# Altium PCB CTR-IMU-Board-Rev-B.PcbDoc
Units mil, origin at the board's own origin, x right, y up, seen from the top; angles counter-clockwise.
Board outline 904.88 x 778.79 mil, 2 copper layers (Top Layer, Bottom Layer), stack 61.2 mil thick; 19 components, 13 nets, 69 pads, 18 vias.
Unrouted connection lines stored in the file: 2.
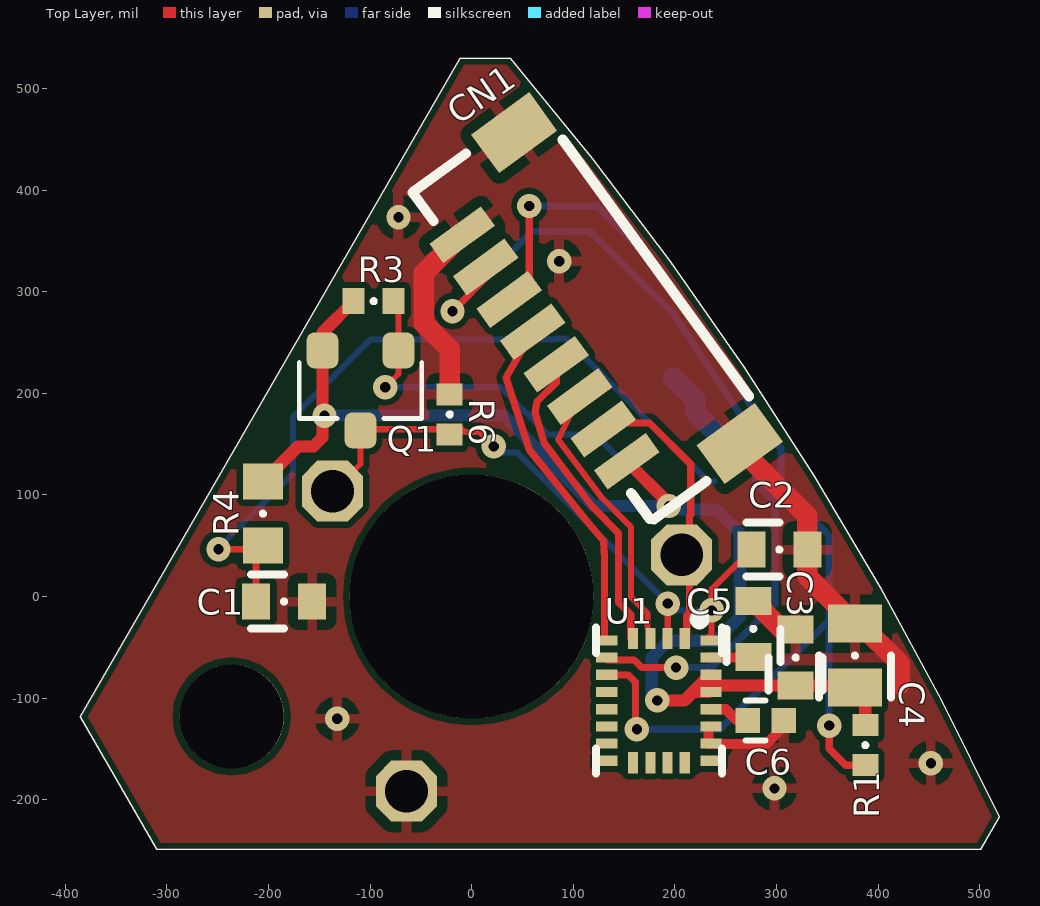
[diagram p0: Top Layer view]
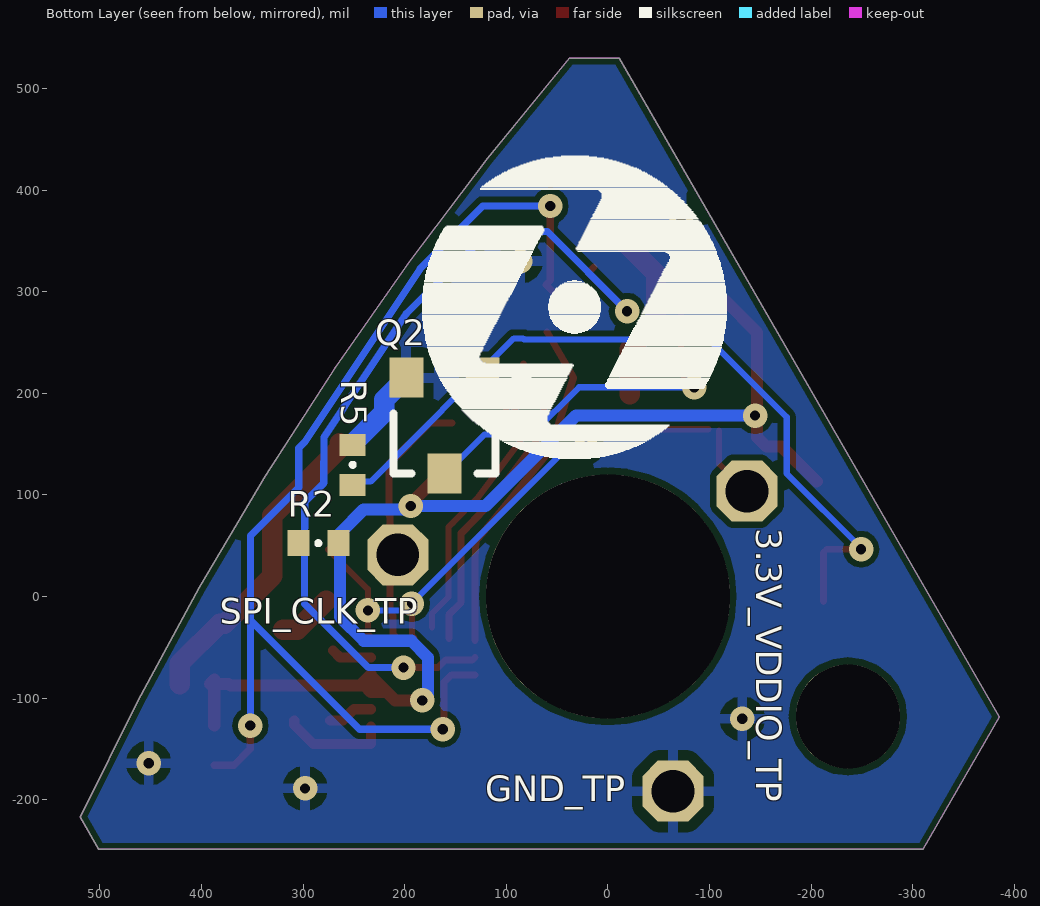
[diagram p1: Bottom Layer view, seen from below]
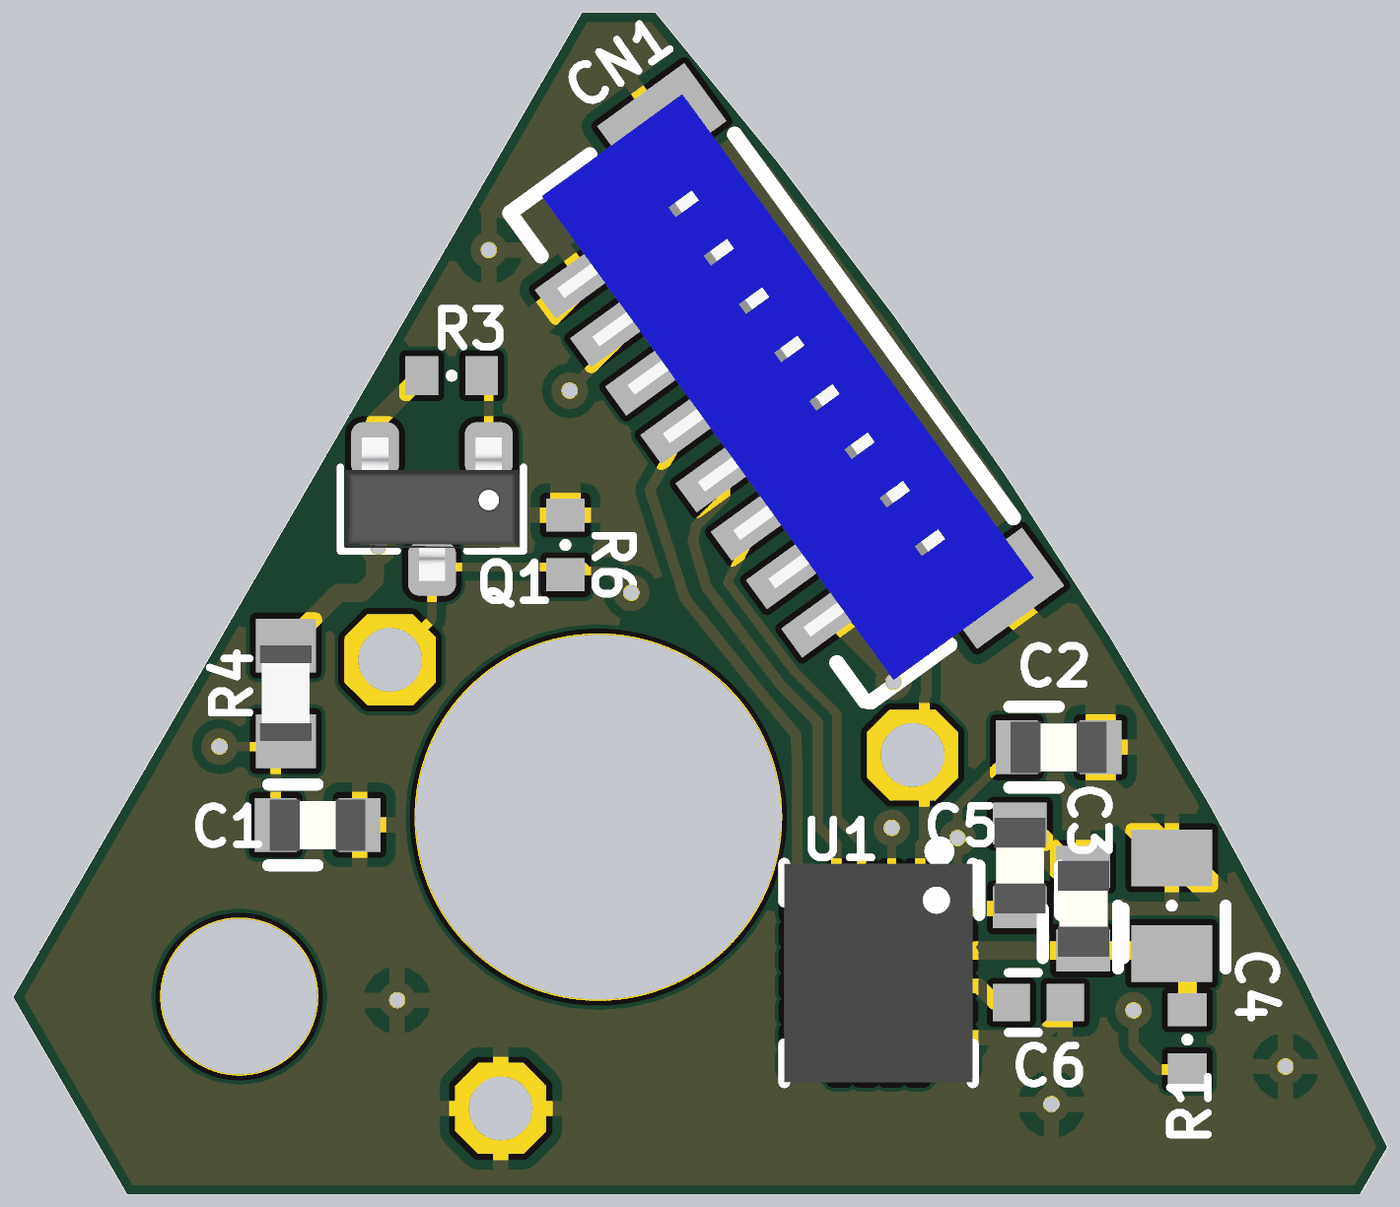
[diagram p2: 3D render of the assembled board from above, using the file's embedded part models]

## Layer stack, top to bottom
Top Solder: solder mask 0.4, Solder Resist, Dk 3.5
Top Layer: signal copper 1.8
Dielectric1: core 57.6, Dk 4.2
Bottom Layer: signal copper 1.8
Bottom Solder: solder mask 0.4, Solder Resist, Dk 3.5

## Board outline
-310.09,-248.96 501.07,-248.96 519.46,-217.11 462.88,-103.06 402.07,8.8 337.13,118.31 268.14,225.32 195.2,329.67 118.41,431.22 37.88,529.83 -11.12,529.83 -385.42,-118.48

## Design rules (kind name [scope] priority, off if disabled: settings)
Clearance [All] p1: gap=6 ignorepadtopadclearanceinfootprint=FALSE except(0: Arc-Hole Track-Hole SMDPad-Hole THPad-Hole Via-Hole Fill-Hole Poly-Hole Region-Hole Text-Hole)
ComponentClearance ComponentClearance_BAT [InComponent('BT1') vs InComponent('CN3')] p1: gap=0 collisioncheckmode=3 verticalgap=0 showdistances=FALSE
ComponentClearance [All] p2: gap=7 collisioncheckmode=3 verticalgap=7 showdistances=FALSE
HoleSize [All] p1: absolutevalues=TRUE maxlimit=300 minlimit=10 maxpercent=80.000 minpercent=20.000
HoleToHoleClearance [All] p1: gap=7 allowstackedmicrovias=TRUE
MinimumSolderMaskSliver [InNet('VIN')] p1: minsoldermaskwidth=0.5
NetAntennae NetAntennae_ANT [InNetClass('ANT')] p1: netantennaetolerance=0
NetAntennae [All] p2: netantennaetolerance=0
PolygonConnect [All] p1: connectstyle=Relief reliefconductorwidth=10 reliefentries=4 polygonreliefangle="90 Angle" airgapwidth=10
RoutingVias [All] p1: holewidth=20 width=34 viastyle="Through Hole" minholewidth=10 minwidth=22 maxholewidth=35 maxwidth=50
SMDNeckDown [All] p1: percent=120.000
SilkToBoardRegionClearance [InNet('3.3V')] p1:
SilkToSilkClearance [All] p1: silktosilkclearance=0
SilkToSolderMaskClearance [IsPad] p1: minsilkscreentomaskgap=0 clearancetoexposedcopper=TRUE
SolderMaskExpansion [All] p1: expansion=4
Width Width_BT [InNetClass('BT')] p1: maxlimit=40 minlimit=10 preferedwidth=15
Width Width_VDD [InNet('3.3V')] p2: maxlimit=20 minlimit=7 preferedwidth=10
Width [All] p3: maxlimit=30 minlimit=6 preferedwidth=7
22 further rules are at their usual default settings.

## Components (designator, comment, footprint, x,y, rotation, side; value= is the part's Value field where it differs from the comment)
3.3V_VDDIO_TP "Test Point" "TestPoint-TH 42 mil" -137.01,103.54 r90 bottom
C1 "0.1uF" CAPC0603(1608)_L -184.65,-5.12 r0 top
C2 "0.1uF" CAPC0603(1608)_L 302.76,46.06 r0 top
C3 "0.1uF" CAPC0603(1608)_L 318.9,-60.24 r90 top
C4 "10uF" CAPC0805(2012)_L 377.17,-58.27 r90 top
C5 "0.1uF" CAPC0603(1608)_L 277.17,-31.89 r90 top
C6 "0.01uF" CAPC0402(1005)_N 289.37,-122.05 r0 top
CN1 "JST 1mm 0.7A" JST-BM08B-SRSS-TB 112.2,274.02 r126 top locked
GND_TP "Test Point" "TestPoint-TH 42 mil" -64.17,-191.73 r90 bottom
Q1 "DMG2305UX" DMG2305UX-7 -109.45,202.76 r180 top locked
Q2 "2N7002P" SOT23 161.02,168.11 r0 bottom
R1 "10K" RESC0402(1005)_N 387.4,-146.46 r270 top
R2 "10K" RESC0402(1005)_N 285.04,52.36 r180 bottom
R3 "47K" RESC0402(1005)_N -96.46,290.55 r0 top
R4 "2.2K" RESC0603(1608)_N -205.51,81.5 r90 top
R5 "200K 0402" RESC0402(1005)_N 251.18,129.53 r270 bottom
R6 "47K" RESC0402(1005)_N -21.65,179.13 r90 top locked
SPI_CLK_TP "Test Point" "TestPoint-TH 42 mil" 206.69,40.94 r90 bottom
U1 "LSM9DS1TR" LSM9DS1TR 184.3,-102.56 r270 top

## Footprints (in the part's own frame and the unit in brackets; to place one, negate y for a bottom-side part, rotate by r counter-clockwise, add the part's x,y. Pads: shape width x height; smd on the part's side, far side on the other; paste and mask are expansions set on the pad)
CAPC0402(1005)_N [mm] "Chip Capacitor, Body 1.0x0.5mm, Height 0.7mm, IPC Medium Density"
  rect 0.62x0.62 smd: 1(-0.45,0) 2(0.45,0)
  silkscreen extent -0.5,-0.5 0,0.5, body extent -0.55,-0.3 0.55,0.3, height 0.7
CAPC0603(1608)_L [mm] "Chip Capacitor, Body 1.6x0.8mm, Height 1.0mm, IPC High Density"
  rect 0.7x0.9 smd: 1(-0.7,0) 2(0.7,0)
  silkscreen extent -0.82,-0.68 0.05,0.68, body extent -0.8,-0.44 0.8,0.43, height 0.86
CAPC0805(2012)_L [mm] "Chip Capacitor, Body 2.0x1.2mm, Height 1.55mm, IPC High Density"
  rect 0.95x1.35 smd: 1(-0.8,0) 2(0.8,0)
  silkscreen extent -1.05,-0.9 0.05,0.9, body extent -1.1,-0.72 1.1,0.72, height 1.55
DMG2305UX-7 [mm] "SOT95P240X110-3L30 - Small Outline Transistor (SOT23), 0.95 mm pitch; 3 pin, 2.90 mm L X 1.30 mm W X 1.10 mm H body"
  rrect50% 0.8x0.9 smd: D(0,1) G(-0.95,-1) S(0.95,-1)
  silkscreen extent -1.53,-0.7 1.53,0.7, body extent -1.45,-1.2 1.45,1.2, height 1.1
JST-BM08B-SRSS-TB [mm] "JST 1mm x 8 SMT Vertical Connector"
  rect 1.2x1.8 smd: 0(-4.8,-1.275) 0(4.8,-1.275)
  rect 0.6x1.6 smd: 1(-3.5,1.275) 2(-2.5,1.275) 3(-1.5,1.275) 4(-0.5,1.275) 5(0.5,1.275) 6(1.5,1.275) 7(2.5,1.275) 8(3.5,1.275)
  silkscreen extent -5.07,-2.15 5.09,1.66, body extent -5,-1.84 5,1.76, height 4.32
LSM9DS1TR [mil] "PQFN, 24-Leads, Body 3.50x3.00mm, Pitch 0.43mm, Thermal Pad 0.00x0.00mm, IPC High Density"
  rect 10x21 smd: 1(-59.25,51.23) 6(-59.25,-51.23) 7(-42.32,-51.23) 8(-25.39,-51.23) 9(-8.46,-51.23) 10(8.46,-51.23) 11(25.39,-51.23) 12(42.32,-51.23) 13(59.25,-51.23) 18(59.25,51.23) 19(42.32,51.23) 20(25.39,51.23) 21(8.46,51.23) 22(-8.46,51.23) 23(-25.39,51.23) 24(-42.32,51.23)
  rect 21x10 smd: 2(-61.07,25.39) 3(-61.07,8.46) 4(-61.07,-8.46) 5(-61.07,-25.39) 14(61.07,-25.39) 15(61.07,-8.46) 16(61.07,8.46) 17(61.07,25.39)
  silkscreen extent -85,-62 72,62, body extent -72,-62 72,62, height 39
RESC0402(1005)_N [mm] "Chip Resistor, Body 1.0x0.5mm, IPC Medium Density"
  rect 0.55x0.65 smd: 1(-0.5,0) 2(0.5,0)
  silkscreen extent -0.05,-0.05 0.05,0.05, body extent -0.52,-0.27 0.53,0.28, height 0.4
RESC0603(1608)_N [mm] "Chip Resistor, Body 1.6x0.8mm, IPC Medium Density"
  rect 0.9x1 smd: 1(-0.8,0) 2(0.8,0)
  silkscreen extent -0.05,-0.05 0.05,0.05, body extent -0.8,-0.43 0.8,0.43, height 0.51
SOT23 [mm] "SOT-23; 3 Leads; Body 3.0 x 2.5 mm, inc. leads (LxW max)"
  rect 0.85x1 smd: 1(-0.95,-1.2) 2(0.95,-1.2) 3(0,1.2)
  silkscreen extent -2.05,-1.32 1.28,1.2, body extent -1.5,-1.27 1.5,1.23, height 1.1
"TestPoint-TH 42 mil" [mil] "Test Point - Thru-Hole 42 mil"
  oct 60x60 hole 42: 1(0,0)

## Part data
3.3V_VDDIO_TP GND_TP SPI_CLK_TP: library part "TestPoint, small"
C1 C2 C3 C5: library part "CAP CER 0.1UF 16V 10% X7R 0603", "0.1uF 0603 16V", Capacitance=0.1µF, Manufacturer=Kemet, Manufacturer Part Number=C0603C104K4RACTU, Operating Temperature="-55°C ~ 125°C", Package / Case="0603 (1608 Metric)", Ratings=-, Supplier Part Number 1=399-1096-2-ND, Temperature Coefficient=X7R, Tolerance=±10%, Voltage - Rated=16V, Applications="General Purpose", Category=Capacitors, ComponentLink1Description=http://www.kemet.com/datasheets&C0603C104K4RACTU, ComponentLink1URL=http://www.kemet.com/datasheets&C0603C104K4RACTU, Features=-, Height - Seated (Max)=-, Lead Spacing=-, Lead Style=-, Mounting Type="Surface Mount, MLCC", Packaging="Tape & Reel (TR)", Pricing 1="4000=0.00414, 8000=0.00378, 12000=0.0036, 28000=0.00342, 100000=0.00248 (USD)", RoHS="RoHS Compliant", Size / Dimension="0.063\" L x 0.031\" W (1.60mm x 0.80mm)", Stock 1=2360000, Supplier 1=Digi-Key, Thickness (Max)="0.034\" (0.87mm)"
C4: library part "CAP CER 10UF 10V Y5V 0805", "10uF 0805 10V", Capacitance=10µF, Manufacturer="Taiyo Yuden", Manufacturer Part Number=LMK212F106ZG-T, Operating Temperature="-30°C ~ 85°C", Package / Case="0805 (2012 Metric)", Ratings=-, Supplier Part Number 1=587-1312-1-ND, Temperature Coefficient="Y5V (F)", Tolerance="-20%, +80%", Voltage - Rated=10V, Applications="General Purpose", Category=Capacitors, ComponentLink1Description=http://www.yuden.co.jp/or/product/category/capacitor/LMK212F106ZG-T.pdf, ComponentLink1URL=http://www.yuden.co.jp/or/product/category/capacitor/LMK212F106ZG-T.pdf, Features=-, Height - Seated (Max)=-, Lead Spacing=-, Lead Style=-, Mounting Type="Surface Mount, MLCC", Packaging="Cut Tape (CT)", Pricing 1="1=0.17, 10=0.115, 50=0.0662, 100=0.0546, 250=0.046, 500=0.03852, 1000=0.03163 (USD)", RoHS="RoHS Compliant", Size / Dimension="0.079\" L x 0.049\" W (2.00mm x 1.25mm)", Stock 1=194456, Supplier 1=Digi-Key, Thickness (Max)="0.053\" (1.35mm)"
C6: library part "CAP CER 0.01UF 25V 10% X5R 0402", "0.01uF 0402", Capacitance=10000pF, Manufacturer="Murata Electronics North America", Manufacturer Part Number=GRM155R71E103KA01D, Operating Temperature="-55°C ~ 125°C", Package / Case="0402 (1005 Metric)", Ratings=-, Supplier Part Number 1=490-1312-1-ND, Temperature Coefficient=X7R, Tolerance=±10%, Voltage - Rated=25V, Applications="General Purpose", Category=Capacitors, ComponentLink1Description=http://www.murata.com/~/media/webrenewal/support/library/catalog/products/capacitor/mlcc/c02e.ashx, ComponentLink1URL=http://www.murata.com/~/media/webrenewal/support/library/catalog/products/capacitor/mlcc/c02e.ashx, Features=-, Height - Seated (Max)=-, Lead Spacing=-, Lead Style=-, Mounting Type="Surface Mount, MLCC", Packaging="Cut Tape (CT)", Pricing 1="1=0.1, 10=0.012, 50=0.0066, 100=0.0057, 250=0.00464, 500=0.00396, 1000=0.00309, 5000=0.00258 (USD)", RoHS="RoHS Compliant", Size / Dimension="0.039\" L x 0.020\" W (1.00mm x 0.50mm)", Stock 1=4802323, Supplier 1=Digi-Key, Thickness (Max)="0.022\" (0.55mm)"
CN1: library part JST-BM08B-SRSS-TB(LF)(SN), "1mm Locking Header, 8-Pin", Manufacturer="Japan Solderless Terminals (JST)", Manufacturer Part Number=BM08B-SRSS-TB(LF)(SN), Supplier Part Number 1=455-1794-1-ND, ComponentLink1Description=https://datasheet.ciiva.com/730/esr-730608.pdf, ComponentLink1URL=https://datasheet.ciiva.com/730/esr-730608.pdf, ComponentLink2Description=https://datasheet.ciiva.com/26894/getdatasheetpartid-640965-26894529.pdf, ComponentLink2URL=https://datasheet.ciiva.com/26894/getdatasheetpartid-640965-26894529.pdf, ComponentLink3Description=https://datasheet.ciiva.com/712/esr-712616.pdf, ComponentLink3URL=https://datasheet.ciiva.com/712/esr-712616.pdf, ComponentLink4Description=https://datasheet.ciiva.com/712/esr-712617.pdf, ComponentLink4URL=https://datasheet.ciiva.com/712/esr-712617.pdf, ComponentLink5Description=https://datasheet.ciiva.com/8052/91630-8052091.pdf, ComponentLink5URL=https://datasheet.ciiva.com/8052/91630-8052091.pdf, ComponentLink6Description=https://datasheet.ciiva.com/16380/esr-16380526.pdf, ComponentLink6URL=https://datasheet.ciiva.com/16380/esr-16380526.pdf, No of Positions=8, Pitch="1 mm", Pricing 1="1=0.93, 10=0.814, 100=0.7024, 500=0.5747 (USD)", Stock 1=18919, Style/Orientation="Vertical Header/Plug", Supplier 1=Digikey, Termination=Solder, Type="Shrouded Header"
Q1: "MOSFET P-CH 20V 4.2A SOT23", Current - Continuous Drain (Id) @ 25°C="4.2A (Ta)", Drain to Source Voltage (Vdss)=20V, Input Capacitance (Ciss) @ Vds="808pF @ 15V", Manufacturer="Diodes Incorporated", Manufacturer Part Number=DMG2305UX-7, Operating Temperature="-55°C ~ 150°C (TJ)", Package / Case="TO-236-3, SC-59, SOT-23-3", Power - Max=1.4W, Supplier Device Package=SOT-23, Supplier Part Number 1=DMG2305UX-7DICT-ND, Category="Discrete Semiconductor Products", ComponentLink1Description=http://www.diodes.com/_files/datasheets/DMG2305UX.pdf, ComponentLink1URL=http://www.diodes.com/_files/datasheets/DMG2305UX.pdf, Creator=osman, FET Feature=Standard, FET Type="MOSFET P-Channel, Metal Oxide", Gate Charge (Qg) @ Vgs="10.2nC @ 4.5V", Mounting Type="Surface Mount", Packaging="Cut Tape (CT)", Pricing 1="1=0.38, 10=0.311, 100=0.1649, 500=0.10846, 1000=0.0739 (USD)", Rds On (Max) @ Id, Vgs="52 mOhm @ 4.2A, 4.5V", RoHS="RoHS Compliant", Stock 1=78669, Supplier 1=Digi-Key, Vgs(th) (Max) @ Id="900mV @ 250µA"
Q2: "MOSFET N-CH 60V 0.36A SOT-23", Current - Continuous Drain (Id) @ 25°C="360mA (Ta)", Drain to Source Voltage (Vdss)=60V, Drive Voltage (Max Rds On,  Min Rds On)=10V, Input Capacitance (Ciss) (Max) @ Vds="50pF @ 10V", Manufacturer="Nexperia USA Inc.", Manufacturer Part Number=2N7002P,235, Operating Temperature="-55°C ~ 150°C (TJ)", Package / Case="TO-236-3, SC-59, SOT-23-3", Power Dissipation (Max)="350mW (Ta)", Supplier Device Package="TO-236AB (SOT23)", Supplier Part Number 1=1727-1865-1-ND, Category="Discrete Semiconductor Products", ComponentLink1Description=http://assets.nexperia.com/documents/data-sheet/2N7002P.pdf, ComponentLink1URL=http://assets.nexperia.com/documents/data-sheet/2N7002P.pdf, FET Feature=-, FET Type=N-Channel, Gate Charge (Qg) (Max) @ Vgs="0.8nC @ 4.5V", Mounting Type="Surface Mount", Packaging="Cut Tape (CT)", Part Status=Active, Pricing 1="1=0.15, 10=0.135, 100=0.0735, 500=0.04522, 1000=0.03084 (USD)", Rds On (Max) @ Id, Vgs="1.6 Ohm @ 500mA, 10V", RoHS="RoHS Compliant", Stock 1=77037, Supplier 1=Digi-Key, Technology="MOSFET (Metal Oxide)", Vgs (Max)=±20V, Vgs(th) (Max) @ Id="2.4V @ 250µA"
R1 R2: library part "RES 10K OHM 1% 1/10W 0402", "10K 0402", Manufacturer="Panasonic Electronic Components", Manufacturer Part Number=ERJ-2RKF1002X, Operating Temperature="-55°C ~ 155°C", Package / Case="0402 (1005 Metric)", Power (Watts)="0.1W, 1/10W", Resistance (Ohms)=10k, Supplier Device Package=0402, Supplier Part Number 1=P10.0KLCT-ND, Temperature Coefficient=±100ppm/°C, Tolerance=±1%, Category=Resistors, ComponentLink1Description=http://industrial.panasonic.com/www-cgi/jvcr13pz.cgi?E+PZ+3+AOA0002+ERJ2RKF1002X+7+WW, ComponentLink1URL=http://industrial.panasonic.com/www-cgi/jvcr13pz.cgi?E+PZ+3+AOA0002+ERJ2RKF1002X+7+WW, Composition="Thick Film", Creator=osman, Features="Automotive AEC-Q200", Height="0.016\" (0.40mm)", Number of Terminations=2, Packaging="Cut Tape (CT)", Pricing 1="1=0.1, 50=0.0196, 100=0.0149, 250=0.01104, 500=0.00816, 1000=0.00544, 5000=0.00383 (USD)", RoHS="RoHS Compliant", Size / Dimension="0.039\" L x 0.020\" W (1.00mm x 0.50mm)", Stock 1=8784573, Supplier 1=Digi-Key
R3 R6: library part "RES 47K OHM 5% 1/10W 0402", "47K 0402", Manufacturer="Panasonic Electronic Components", Manufacturer Part Number=ERJ-2GEJ473X, Operating Temperature="-55°C ~ 155°C", Package / Case="0402 (1005 Metric)", Power (Watts)="0.1W, 1/10W", Resistance (Ohms)=47k, Supplier Device Package=0402, Supplier Part Number 1=P47KJCT-ND, Temperature Coefficient=±200ppm/°C, Tolerance=±5%, Category=Resistors, ComponentLink1Description=http://industrial.panasonic.com/www-cgi/jvcr13pz.cgi?E+PZ+3+AOA0001+ERJ2GEJ473X+7+WW, ComponentLink1URL=http://industrial.panasonic.com/www-cgi/jvcr13pz.cgi?E+PZ+3+AOA0001+ERJ2GEJ473X+7+WW, Composition="Thick Film", Features="Automotive AEC-Q200", Height="0.016\" (0.40mm)", Number of Terminations=2, Packaging="Cut Tape (CT)", Pricing 1="1=0.1, 50=0.0106, 100=0.0078, 250=0.00596, 500=0.00476, 1000=0.0035, 5000=0.00251 (USD)", RoHS="RoHS Compliant", Size / Dimension="0.039\" L x 0.020\" W (1.00mm x 0.50mm)", Stock 1=1670564, Supplier 1=Digi-Key
R4: library part "RES 2.2K OHM 1/10W 5% 0603 SMD", "2.2K 0603", Manufacturer="Panasonic Electronic Components", Manufacturer Part Number=ERJ-3GEYJ222V, Package / Case="0603 (1608 Metric)", Power (Watts)="0.1W, 1/10W", Resistance (Ohms)=2.2k, Supplier Device Package=0603, Supplier Part Number 1=P2.2KGCT-ND, Temperature Coefficient=±200ppm/°C, Tolerance=±5%, Category=Resistors, ComponentLink1Description=http://industrial.panasonic.com/www-cgi/jvcr13pz.cgi?E+PZ+3+AOA0001+ERJ3GEYJ222V+7+WW, ComponentLink1URL=http://industrial.panasonic.com/www-cgi/jvcr13pz.cgi?E+PZ+3+AOA0001+ERJ3GEYJ222V+7+WW, Composition="Thick Film", Features=-, Height="0.022\" (0.55mm)", Number of Terminations=2, Packaging="Cut Tape (CT)", Pricing 1="1=0.1, 50=0.0126, 100=0.0096, 250=0.00716, 500=0.00528, 1000=0.00352, 2500=0.00297 (USD)", RoHS="RoHS Compliant", Size / Dimension="0.063\" L x 0.031\" W (1.60mm x 0.80mm)", Stock 1=685364, Supplier 1=Digi-Key
R5: library part "RES 200K OHM 1% 1/10W 0402", Manufacturer="Panasonic Electronic Components", Manufacturer Part Number=ERJ-2RKF2003X, Operating Temperature="-55°C ~ 155°C", Package / Case="0402 (1005 Metric)", Power (Watts)="0.1W, 1/10W", Resistance (Ohms)=200k, Supplier Device Package=0402, Supplier Part Number 1=P200KLCT-ND, Temperature Coefficient=±100ppm/°C, Tolerance=±1%, Category=Resistors, ComponentLink1Description=http://industrial.panasonic.com/www-cgi/jvcr13pz.cgi?E+PZ+3+AOA0002+ERJ2RKF2003X+7+WW, ComponentLink1URL=http://industrial.panasonic.com/www-cgi/jvcr13pz.cgi?E+PZ+3+AOA0002+ERJ2RKF2003X+7+WW, Composition="Thick Film", Creator=osman, Features="Automotive AEC-Q200", Height="0.016\" (0.40mm)", Number of Terminations=2, Packaging="Cut Tape (CT)", Pricing 1="1=0.1, 50=0.0196, 100=0.0149, 250=0.01104, 500=0.00816, 1000=0.00544, 5000=0.00383 (USD)", RoHS="RoHS Compliant", Size / Dimension="0.039\" L x 0.020\" W (1.00mm x 0.50mm)", Stock 1=748497, Supplier 1=Digi-Key
U1: "IMU ACCEL/GYRO/MAG I2C/SPI", Manufacturer=STMicroelectronics, Sensor Case Style=LGA, Supplier Part Number 1=497-14946-1-ND, Supply Voltage Max=3.6V, Supply Voltage Min=1.9V, Acceleration Range="± 2g, ± 4g, ± 8g, ± 16g", ComponentLink1Description=http://www.farnell.com/datasheets/2028150.pdf, ComponentLink1URL=http://www.farnell.com/datasheets/2028150.pdf, Gyroscope Range="± 245°/s, ± 500°/s, ± 2000°/s", Manufacturer Part Number=LSM9DS1TR, MEMS Module Function="Tri-Axis Gyroscope, Tri-Axis Accelerometer, Tri-Axis Magnetometer", MSL="MSL 3 - 168 hours", No. of Pins=24Pins, Packaging="Cut Tape", Pricing 1="1=6.4, 10=5.751, 100=4.7119 (USD)", Product Range=-, Stock 1=0, Supplier 1=Digikey, SVHC="No SVHC (17-Dec-2015)"

## Free pads (board coordinates)
  round 102.36 hole 102.36: 1(-236.22,-118.11)
  round 240.16 hole 240.16: 1(0,0)

## Via types
v1: diameter 24, hole 10, Top Layer to Bottom Layer, tented both sides, 18 vias

## Nets (pads, with @x,y where several pads share a name; then routed paths per layer and width w, separated by ;. In a path a pad name is that pad's centre, name@x,y a point inside that pad or via, vN(x,y) a via of type N, cw(c..) or ccw(c..) an arc to the next point about the centre after c; other vN are vias at no path point)
3.3V: C3.1 C4.1 CN1.1 Q1.S R1.2 R2.2 R3.1 R4.2 U1.22 U1.23 | length 1273.7
  Top Layer w12: R4.2 -170.87,147.64 -155.91,147.64 -146.85,156.69 Q1.S -146.85,259.84 R3.1 ; CN1.1 194.09,91.53 v1(194.09,88.98) ; v1(182.68,-102.36) 209.36,-102.36 217.69,-94.02 ; C3.1@317.32,-87.8 243.72,-87.8 ; C3.1@319.68,-87.8 371.65,-87.8 373.23,-86.22 391.73,-86.22 387.4,-81.89 387.4,-126.77 ; 217.69,-94.02 233.17,-78.55 233.17,-77.24 243.72,-87.8 ; 217.69,-94.02 233.17,-94.02 239.39,-87.8 243.72,-87.8
  Bottom Layer w12: v1(-144.88,177.95) 31.5,177.95 120.47,88.98 v1(194.09,88.98) 197.64,85.43 238.98,85.43 240.55,85.43 263.78,62.2 263.78,-20.16 240.24,-43.7 193.62,-43.7 177.18,-60.14 177.18,-96.87 v1(182.68,-102.36)
3.3V_VDDIO: 3.3V_VDDIO_TP.1 C2.1 Q1.D R6.1 U1.1 U1.3 | length 636.5
  Top Layer w6: 3.3V_VDDIO_TP.1@-152.56,87.2 -109.45,130.32 Q1.D ; Q1.D@-99.21,164.57 -9.84,164.57 -7.28,162.01 7.28,162.01 v1(21.65,147.64) ; U1.3@190.4,-41.49 190.16,-41.24 192.95,-38.45 v1(192.95,-7.05) ; U1.1@233.17,-43.31 231.5,-41.64 236.22,-36.91 v1(236.22,-13.78) 236.22,7.09 C2.1
  Bottom Layer w6: v1@29.92,141.73 44.49,141.73 200,-13.78 v1(236.22,-13.78)
CS_IMU: CN1.7 R2.1 U1.7 | length 860.3
  Top Layer w7: v1(-18.9,280.71) 19.14,318.74 CN1.7 ; U1.7@130.71,-60.24 133.14,-62.67 159.91,-62.67 167.32,-70.08 v1(201.18,-70.08)
  Bottom Layer w7: v1(-18.9,280.71) 59.45,359.06 116.35,359.06 198.59,278.1 ; 198.49,278.26 198.59,278.1 ; v1(201.18,-70.08) 235.78,-70.08 298.58,-7.28 298.58,-5.63 298.48,39.7 298.36,92.79 279.63,111.45 279.53,156.69 198.59,278.1
CS_MAG: CN1.6 R1.1 U1.8 | length 1150.4
  Top Layer w7: CN1.6 46.62,292.29 61.02,306.69 56.69,311.02 v1(56.69,384.25) ; U1.8@130.71,-77.17 153.94,-77.17 161.18,-84.41 161.18,-129.29 v1(162.6,-130.71) ; v1(351.97,-127.17) 351.97,-150 368.11,-166.14 387.4,-166.14
  Bottom Layer w7: v1(56.69,384.25) 123.23,384.25 184.65,322.83 298.82,151.57 304.3,146.09 304.3,107.25 351.57,59.98 351.57,-23.62 ; v1(162.6,-130.71) 244.49,-130.71 351.57,-23.62 ; v1@351.97,-129.53 v1(351.97,-127.17) 351.57,-126.77 351.57,-23.62
GND: C1.2 C2.2 C3.2 C4.2 C5.2 C6.2 CN1.0 CN1.8 GND_TP.1 Q2.2 R5.1 R6.2 U1.19 U1.20 | length 736.1
  Top Layer w10: U1.20@233.17,-127.95 233.17,-144.88 233.17,-145.25 289.99,-145.25 308.66,-126.58 C6.2@308.66,-122.05
  Top Layer w20: R6.2 -21.65,243.21 -47.29,268.85 -47.29,318.1 CN1.8 ; CN1.0@263.89,150.64 263.89,145.95 330.32,79.53 C2.2 330.32,20.08 C4.2 382.08,-26.77 421.26,-65.96 421.26,-86.61 ; C5.2 305.51,-32.68 C3.2@319.68,-32.68
  Bottom Layer w20: Q2.2 220.15,193.63 220.15,181.43 251.18,150.39 R5.1
  other v1: 298.03,-188.98 451.97,-164.17 -132.28,-120.47 86.22,329.92 -72.05,373.23
MISO_IMU: CN1.4 U1.5 | length 310.8
  Top Layer w7: CN1.4 83.17,210.49 64.38,191.71 62.2,181.1 71.25,151.18 119.62,87.34 144.4,62.12 144.4,-5.88 156.54,-18.02 U1.5@156.54,-41.49
MISO_MAG: CN1.5 U1.6 | length 340.4
  Top Layer w7: CN1.5 33.86,215.35 56.84,144.09 110.71,77.24 129.92,54.33 130.71,36.61 U1.6@130.71,-43.31
MOSI: CN1.3 U1.4 | length 280.6
  Top Layer w6: CN1.3 89.37,163.31 84.95,154.58 128.35,96.85 152.65,72.33 156.9,68.08 156.9,-0.7 173.23,-17.03 173.23,-30.31
  Top Layer w7: CN1.3@91.25,177 CN1.3@91.25,192.42
NetC1_1: C1.1 Q2.1 R4.1 R5.2 | length 752.6
  Top Layer w6: v1(-249.21,46.46) -215.35,46.46 R4.1@-212.2,43.31
  Top Layer w7: C1.1 R4.1@-212.2,43.31
  Bottom Layer w6: v1(-249.21,46.46) -249.21,47.64 -176.01,120.84 -176.01,176.53 -99.78,252.76 82.28,252.76 83.46,253.94 92.52,253.94 233.46,112.99 R5.2@238.98,112.99
NetC5_1: C5.1 U1.24 | length 40.2
  Top Layer w10: U1.24@233.17,-60.24 263.39,-60.24 C5.1@270.47,-53.15
NetC6_1: C6.1 U1.21 | length 44.6
  Top Layer w10: U1.21@233.17,-111.02 250,-111.02 261.02,-122.05 C6.1@273.23,-122.05
NetQ1_G: Q1.G Q2.3 R3.2 | length 354.3
  Top Layer w6: v1(-85.04,205.91) -72.05,218.9 Q1.G -72.05,285.83 R3.2
  Bottom Layer w6: v1(-85.04,205.91) 28.35,205.91 74.8,159.45 121.26,159.45 Q2.3@147.24,133.46
SPI_CLK: CN1.2 SPI_CLK_TP.1 U1.2 | length 257.6
  Top Layer w7: CN1.2@112.69,159.41 CN1.2@112.69,162.95 ; CN1.2@153.26,170.6 175.06,170.6 215.59,130.07 215.59,80.07 214.45,78.93 214.45,-15.96 211.66,-18.76 211.66,-37.16 U1.2@207.33,-41.49
pads on no net: U1.9 U1.10 U1.11 U1.12 U1.13 U1.14 U1.15 U1.16 U1.17 U1.18

## Polygon pours and split planes (outlines as drawn)
GND on Bottom Layer "GND_L02_P000" (solid, remove dead copper, pour order 0): -411.81,-118.48 -36.37,529.83 37.88,554.74 561.21,-193.96 524.63,-272.52 -310.09,-285.43
GND on Top Layer "GND_L01_P002" (solid, remove dead copper, pour order 2): -385.42,-72.61 -11.12,560.75 118.86,529.83 576.93,-217.11 587.11,-274.41 -393.57,-274.41

## Keep-outs
Keep-Out Layer:
  the board outline again, w1

## Silkscreen, mask and mechanical layers (free items; w line width, h text height)
Top Overlay:
  the board outline again, w1
Bottom Overlay:
  drawing of 513 lines, arcs and shapes, not listed
Mechanical 1:
  the board outline again, w1
Mechanical 15:
  circle w1: c0,0 r200.79